# EAGLE board CT_schematic (EAGLE 7.6.0)

Size 100 x 80 mm. Coordinates in mm from the lower left corner, seen from the top.
Outline: 0,0 100,0 100,80 0,80 0,0
Copper layers (1*16): Top 0.035mm / dielectric 1.5mm / Bottom 0.035mm
Design rules "default": minimum track width 10mil, minimum drill 24mil, track to track 8mil, track to pad 8mil, pad to pad 8mil, via to via 8mil, smd to smd 8mil, copper to edge 40mil, drill to drill 8mil, minimum pad ring 10mil, minimum via ring 8mil, stop-mask expansion 4mil, vias tented up to drill 0mil, thermal gap 10mil

## Footprints (pad centres in the part's own frame; a part is rotated, then mirrored left to right if it is on the bottom)
C0603 = smd 0.8 x 0.8: 1 -0.762,0; 2 0.762,0
C0402 = smd 0.5 x 0.5: 1 -0.508,0; 2 0.508,0
C0805 = smd 1.2 x 1.3: 1 -1.016,0; 2 1.016,0
C1210 = smd 1.2 x 2.5: 1 -1.524,0; 2 1.524,0
C1206 = smd 1.3 x 1.6: 1 -1.524,0; 2 1.524,0
L0603 = smd 0.8 x 0.8: 1 -0.762,0; 2 0.762,0
L1210 = smd 1.2 x 2.5: 1 -1.524,0; 2 1.524,0
R0603 = smd 0.8 x 0.8: 1 -0.762,0; 2 0.762,0
UFQFPN28 = smd 0.559 x 0.305: 1 -2.07,1.5; 7 -2.07,-1.5; 15 2.07,-1.5; 21 2.07,1.5 | smd 0.813 x 0.305: 2 -1.943,1; 3 -1.943,0.5; 4 -1.943,0; 5 -1.943,-0.5; 6 -1.943,-1; 16 1.943,-1; 17 1.943,-0.5; 18 1.943,0; 19 1.943,0.5; 20 1.943,1 | smd 0.305 x 0.559: 8 -1.5,-2.07; 14 1.5,-2.07; 22 1.5,2.07; 28 -1.5,2.07 | smd 0.305 x 0.813: 9 -1,-1.943; 10 -0.5,-1.943; 11 0,-1.943; 12 0.5,-1.943; 13 1,-1.943; 23 1,1.943; 24 0.5,1.943; 25 0,1.943; 26 -0.5,1.943; 27 -1,1.943
SSOP-20 = smd 1.651 x 0.432: 1 -3.48,2.925; 2 -3.48,2.275; 3 -3.48,1.625; 4 -3.48,0.975; 5 -3.48,0.325; 6 -3.48,-0.325; 7 -3.48,-0.975; 8 -3.48,-1.625; 9 -3.48,-2.275; 10 -3.48,-2.925; 11 3.48,-2.925; 12 3.48,-2.275; 13 3.48,-1.625; 14 3.48,-0.975; 15 3.48,-0.325; 16 3.48,0.325; 17 3.48,0.975; 18 3.48,1.625; 19 3.48,2.275; 20 3.48,2.925
182-009-MALE = drill 1.194 pad 1.524 octagon: 1 -5.537,10.923; 2 -2.769,10.923; 3 0,10.923; 4 2.769,10.923; 5 5.537,10.923; 6 -4.153,8.08; 7 -1.384,8.08; 8 1.384,8.08; 9 4.153,8.08 | hole 3.048: -12.446,9.501; 12.446,9.501
ABS07-32.768KHZ-7-T = smd 1.1 x 2.4: 1 -2.5,0; 2 0,0
ASFL1 = smd 1.7 x 1.5: 1 -1.27,-1.1; 2 1.27,-1.1; 3 1.27,1.1; 4 -1.27,1.1
SOIC-8_EP = smd 1.6 x 0.533: 1 -2.921,1.905; 2 -2.921,0.635; 3 -2.921,-0.635; 4 -2.921,-1.905; 5 2.921,-1.905; 6 2.921,-0.635; 7 2.921,0.635; 8 2.921,1.905 | smd 2.54 x 3.302: EPAD 0,0 | drill 0.406 pad 0.406: P$1 -0.508,0.635; P$2 0.381,0.635; P$3 -0.508,-0.635; P$4 0.381,-0.635
DFN8_2X3MC = smd 0.813 x 0.305: 1 -1.398,0.75; 2 -1.398,0.25; 3 -1.398,-0.25; 4 -1.398,-0.75; 5 1.398,-0.75; 6 1.398,-0.25; 7 1.398,0.25; 8 1.398,0.75 | smd 1.753 x 1.549: 9 0,0
JST-2-SMD = smd 1 x 4.6: 1 -1,-3.7; 2 1,-3.7 | smd 1.6 x 3.4: NC1 -3.4,1.5; NC2 3.4,1.5
FCI_10118193-0001LF = smd 0.4 x 1.35: 1 -1.3,2.675; 2 -0.65,2.675; 3 0,2.675; 4 0.65,2.675; 5 1.3,2.675 | smd 1.6 x 1.4: 6 -3.2,2.45; 7 3.2,2.45 | smd 1.9 x 1.9: 8 -1.2,0; 9 1.2,0 | hole 0.5: -3.3,0; 3.3,0
SON-6 = smd 0.55 x 0.3: 1 -0.355,0.5 | smd 0.52 x 0.3: 2 -0.37,0; 3 -0.37,-0.5; 4 0.37,-0.5; 5 0.37,0; 6 0.37,0.5
SW_4-1437565-2 = smd 1.4 x 2.1: 1 -2.23,4.55; 2 -2.23,-4.55; 3 2.23,4.55; 4 2.23,-4.55
LGM67K-G1J2-24-Z = smd 0.8 x 1.4: A -2,0; C 0,0
NC7SZ125M5X = smd 1.3 x 0.7: 1 -1.3,0.95; 2 -1.3,0; 3 -1.3,-0.95; 4 1.3,-0.95; 5 1.3,0.95

## Placement (x,y rotation side)
C1  1e-07  [C0603]  -63.5,58.42 0 top  (outside the outline)
C2  1e-07  [C0603]  -15.24,63.5 0 top  (outside the outline)
C3  1e-07  [C0603]  -19.05,63.5 0 top  (outside the outline)
C4  1e-07  [C0603]  -22.86,63.5 0 top  (outside the outline)
C5  4.7e-06  [C0603]  -59.69,58.42 0 top  (outside the outline)
C6  1e-08  [C0603]  -26.67,63.5 0 top  (outside the outline)
C7  1e-06  [C0603]  -30.48,63.5 0 top  (outside the outline)
C8  1e-11  [C0402]  -19.05,68.58 0 top  (outside the outline)
C9  1e-11  [C0402]  -22.86,68.58 0 top  (outside the outline)
C10  1e-06  [C0603]  -34.29,63.5 0 top  (outside the outline)
C11  1e-06  [C0603]  -38.1,63.5 0 top  (outside the outline)
C12  1e-06  [C0603]  -41.91,63.5 0 top  (outside the outline)
C13  4.7e-06  [C0805]  -50.8,53.34 0 top  (outside the outline)
C14  1e-08  [C0402]  -26.67,68.58 0 top  (outside the outline)
C15  1e-05  [C1210]  -29.21,46.99 0 top  (outside the outline)
C16  1e-05  [C1210]  -35.56,46.99 0 top  (outside the outline)
C17  1e-05  [C1210]  -41.91,46.99 0 top  (outside the outline)
C18  1e-05  [C1210]  -48.26,46.99 0 top  (outside the outline)
C19  1e-07  [C0402]  -30.48,68.58 0 top  (outside the outline)
C20  1e-05  [C1206]  -33.02,53.34 0 top  (outside the outline)
C21  1e-05  [C1206]  -39.37,53.34 0 top  (outside the outline)
C22  1e-08  [C0402]  -34.29,68.58 0 top  (outside the outline)
F1  240.0  [L0603]  -45.72,63.5 0 top  (outside the outline)
I1  1.5e-05  [L1210]  -54.61,46.99 0 top  (outside the outline)
R1  10000.0  [R0603]  -35.56,58.42 0 top  (outside the outline)
R2  1000.0  [R0603]  -49.53,63.5 0 top  (outside the outline)
R3  1600.5  [R0603]  -53.34,63.5 0 top  (outside the outline)
R4  4700.0  [R0603]  -57.15,63.5 0 top  (outside the outline)
R5  10000.0  [R0603]  -40.64,58.42 0 top  (outside the outline)
R6  100000.0  [R0603]  -64.77,53.34 0 top  (outside the outline)
R7  100000.0  [R0603]  -15.24,58.42 0 top  (outside the outline)
R8  100000.0  [R0603]  -20.32,58.42 0 top  (outside the outline)
R9  4031.5447154472  [R0603]  -59.69,53.34 0 top  (outside the outline)
R10  2200.0  [R0603]  -60.96,63.5 0 top  (outside the outline)
R11  10000.0  [R0603]  -45.72,58.42 0 top  (outside the outline)
R12  10000.0  [R0603]  -50.8,58.42 0 top  (outside the outline)
R13  9100.0  [R0603]  -64.77,63.5 0 top  (outside the outline)
R14  680000.0  [R0603]  -25.4,58.42 0 top  (outside the outline)
R15  120000.0  [R0603]  -30.48,58.42 0 top  (outside the outline)
R16  2000.0  [R0603]  -15.24,68.58 0 top  (outside the outline)
R17  10000.0  [R0603]  -55.88,58.42 0 top  (outside the outline)
U1  STM32L031G4U6  [UFQFPN28]  -25.4,53.34 0 top  (outside the outline)
U2  MAX3218EAP+T  [SSOP-20]  -52.07,26.67 0 top  (outside the outline)
U3  182-009-113R531  [182-009-MALE]  -36.83,6.35 0 top  (outside the outline)
U4  ABS07-32.768KHZ-7-T  [ABS07-32.768KHZ-7-T]  -55.88,38.1 0 top  (outside the outline)
U5  ASFL1-12MHZ-NCS  [ASFL1]  -26.67,38.1 0 top  (outside the outline)
U6  MIC5234YME  [SOIC-8_EP]  -64.77,36.83 0 top  (outside the outline)
U7  MCP73831T-2ACI/MC  [DFN8_2X3MC]  -43.18,67.31 0 top  (outside the outline)
U8  S2B-PH-SM4-TB(LF)(SN)  [JST-2-SMD]  -41.91,29.21 0 top  (outside the outline)
U9  10118193-0001LF  [FCI_10118193-0001LF]  -35.56,38.1 0 top  (outside the outline)
U10  TPS3895ADRYR  [SON-6]  -36.83,67.31 0 top  (outside the outline)
U11  4-1437565-2  [SW_4-1437565-2]  -27.94,27.94 0 top  (outside the outline)
U12  Q65110A2395  [LGM67K-G1J2-24-Z]  -17.78,46.99 0 top  (outside the outline)
U13  nc7sz125m5x  [NC7SZ125M5X]  -44.45,52.07 0 top  (outside the outline)

## Library data of the parts
C1-C22 F1 I1 R1-R17 U1-U13 = circuit_tree

## Nets
CLK_CRYSTAL_U1_2: C8.1 U1.2 U4.1
CLK_CRYSTAL_U1_3: C9.1 U1.3 U4.2
CLK_U1_6: U1.6 U5.3
GND: C1.2 C2.2 C3.2 C4.2 C5.2 C6.2 C7.2 C8.2 C9.2 C10.2 C11.2 C12.2 C14.2 C15.2 C16.2 C17.2 C18.2 C19.2 C20.2 C21.2 C22.2 R2.2 R5.2 R10.2 R13.2 R15.2 R16.2 U1.16 U1.28 U2.5 U2.17 U2.20 U3.5 U5.2 U6.7 U6.EPAD U7.6 U7.9 U8.2 U9.5 U9.6 U9.7 U9.8 U9.9 U10.2 U12.C U13.1 U13.3
INPUT_USBPOWER_5V: C20.1 R17.2 U7.1 U7.2 U9.1
NET_U1_4: R4.1 U1.4 U13.4
NET_U1_5: C6.1 C7.1 F1.1 U1.5
NET_U1_25: R3.1 U1.25 U12.A
NET_U1_26: R1.1 U1.26 U11.3 U11.4
NET_U1_27: R5.1 U1.27
NET_U2_1: I1.1 U2.1
NET_U2_2: R6.1 U2.2
NET_U2_3: R7.1 U2.3
NET_U2_4: R8.1 U2.4
NET_U2_15: C12.1 U2.15
NET_U2_16: C13.2 U2.16
NET_U2_18: C13.1 U2.18
NET_U2_19: C11.1 U2.19
NET_U3_2: U2.12 U3.2
NET_U3_3: U2.14 U3.3
NET_U3_7: U2.11 U3.7
NET_U3_8: U2.13 U3.8
NET_U6_4: R9.2 R10.1 U6.4
NET_U7_5: R17.1 U7.5
NET_U7_8: R16.1 U7.8
NET_U10_1: R12.1 R13.1 U10.1
NET_U10_3: R14.2 R15.1 U10.3
NET_U10_4: R11.1 U10.4 U13.2
NET_U11_1: R2.1 U11.1 U11.2
PROC_LPUART1_CTS: U1.12 U2.8
PROC_LPUART1_RTS: U1.15 U2.10
PROC_LPUART1_RX: U1.9 U2.9
PROC_LPUART1_TX: U1.8 U2.7
VCC_S1_3V7: C15.1 C16.1 C21.1 U6.5 U6.8 U7.3 U7.4 U8.1
VCC_TIER1_3V3: C1.1 C2.1 C3.1 C4.1 C5.1 C10.1 C14.1 C17.1 C18.1 C19.1 C22.1 F1.2 I1.2 R1.2 R3.2 R4.2 R6.2 R7.2 R8.2 R9.1 R11.2 R12.2 R14.1 U1.1 U1.17 U2.6 U5.4 U6.1 U10.6 U13.5

## Tracks (layer width: path | path; a pad name or v marks a point on that pad's centre or on a via)
CLK_CRYSTAL_U1_2  (2 unrouted)
CLK_CRYSTAL_U1_3  (2 unrouted)
CLK_U1_6  (1 unrouted)
GND  (47 unrouted)
INPUT_USBPOWER_5V  (4 unrouted)
NET_U1_4  (2 unrouted)
NET_U1_5  (3 unrouted)
NET_U1_25  (2 unrouted)
NET_U1_26  (3 unrouted)
NET_U1_27  (1 unrouted)
NET_U2_1  (1 unrouted)
NET_U2_2  (1 unrouted)
NET_U2_3  (1 unrouted)
NET_U2_4  (1 unrouted)
NET_U2_15  (1 unrouted)
NET_U2_16  (1 unrouted)
NET_U2_18  (1 unrouted)
NET_U2_19  (1 unrouted)
NET_U3_2  (1 unrouted)
NET_U3_3  (1 unrouted)
NET_U3_7  (1 unrouted)
NET_U3_8  (1 unrouted)
NET_U6_4  (2 unrouted)
NET_U7_5  (1 unrouted)
NET_U7_8  (1 unrouted)
NET_U10_1  (2 unrouted)
NET_U10_3  (2 unrouted)
NET_U10_4  (2 unrouted)
NET_U11_1  (2 unrouted)
PROC_LPUART1_CTS  (1 unrouted)
PROC_LPUART1_RTS  (1 unrouted)
PROC_LPUART1_RX  (1 unrouted)
PROC_LPUART1_TX  (1 unrouted)
VCC_S1_3V7  (7 unrouted)
VCC_TIER1_3V3  (29 unrouted)